# Altium PCB XLR8_pcb.PcbDoc
Units mm, origin at the board's own origin, x right, y up, seen from the top; angles counter-clockwise.
Board outline 137 x 105 mm, 2 copper layers (Top Layer, Bottom Layer); 70 components, 35 nets, 191 pads, 21 vias.
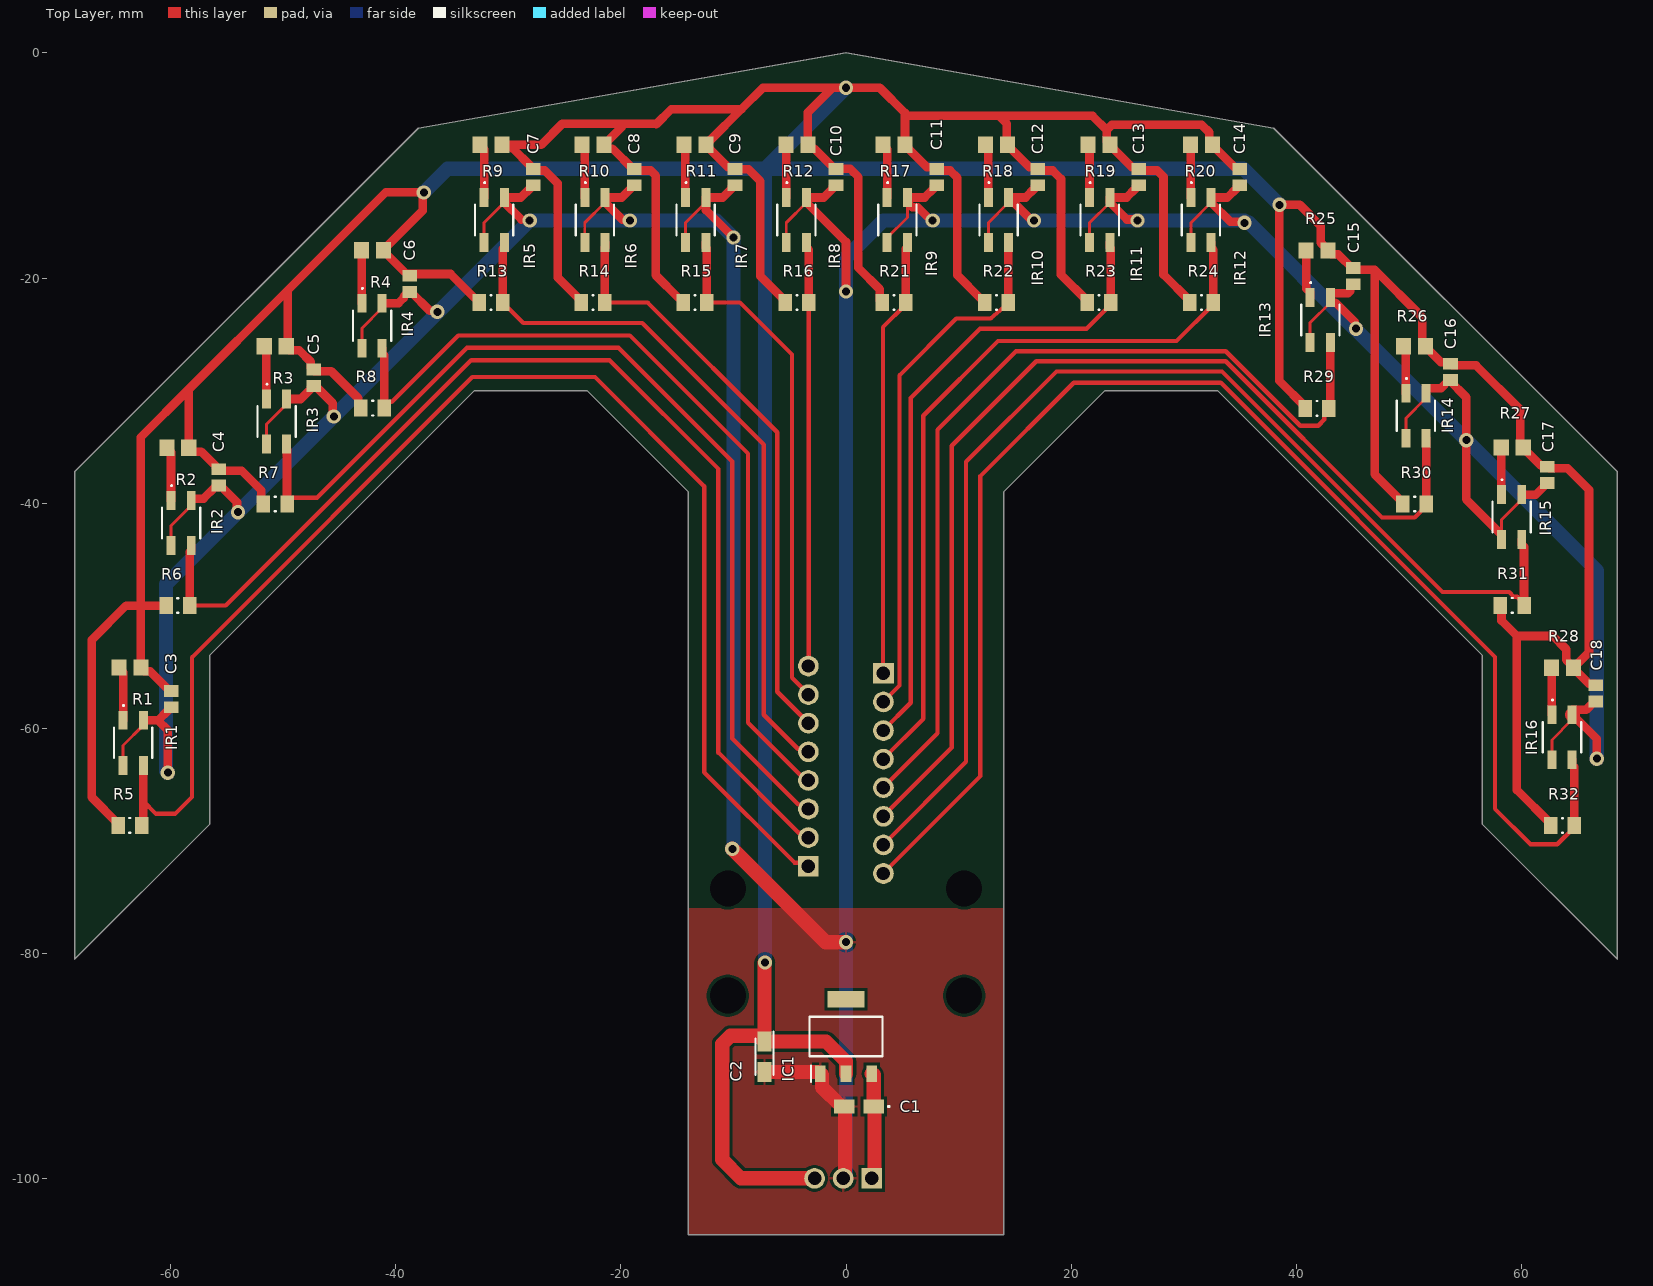
[diagram p0: Top Layer view]
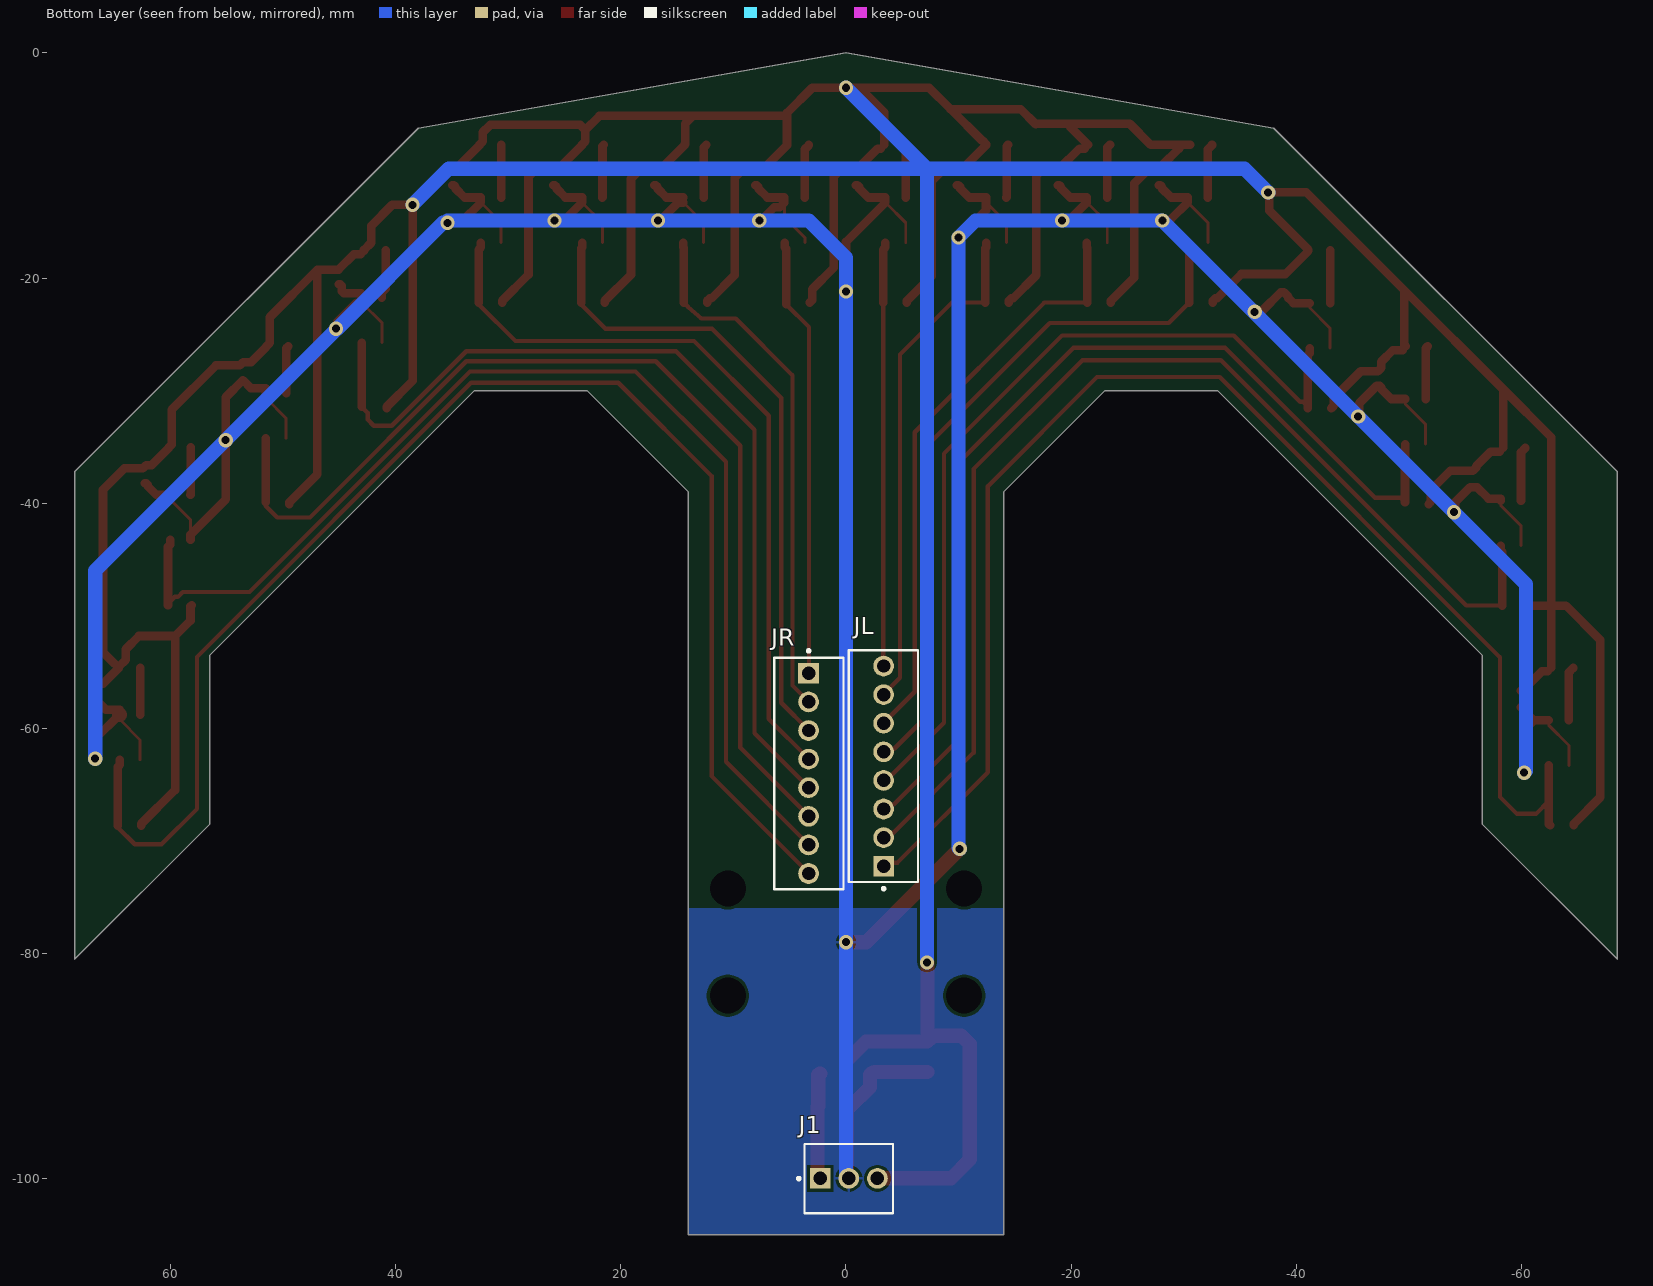
[diagram p1: Bottom Layer view, seen from below]
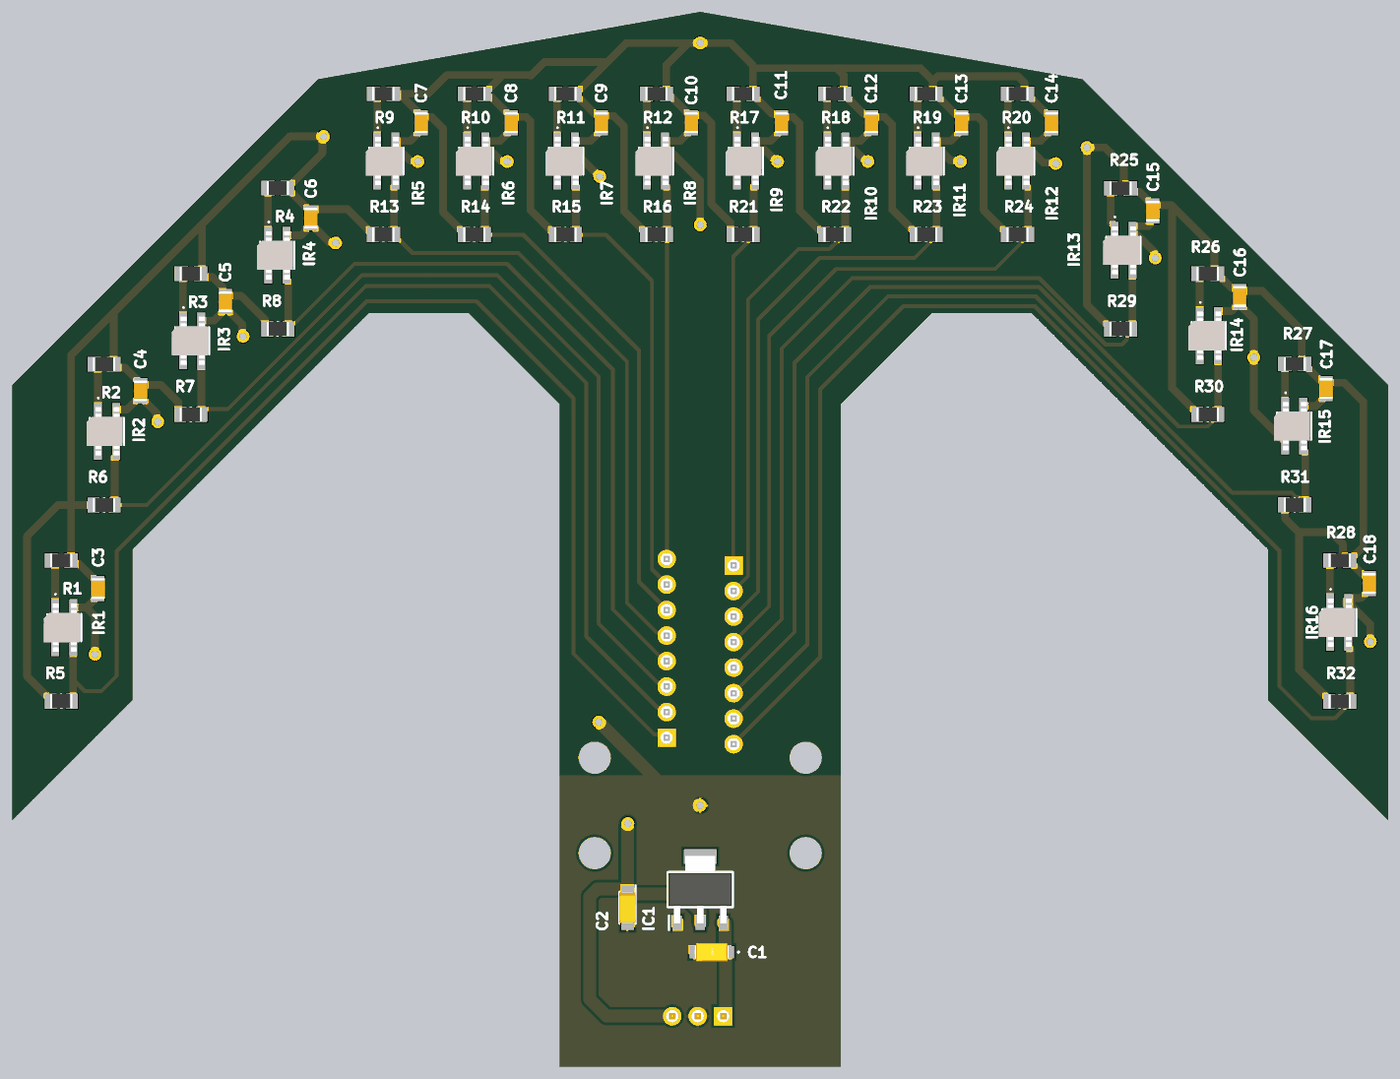
[diagram p2: 3D render of the assembled board from above, using the file's embedded part models]
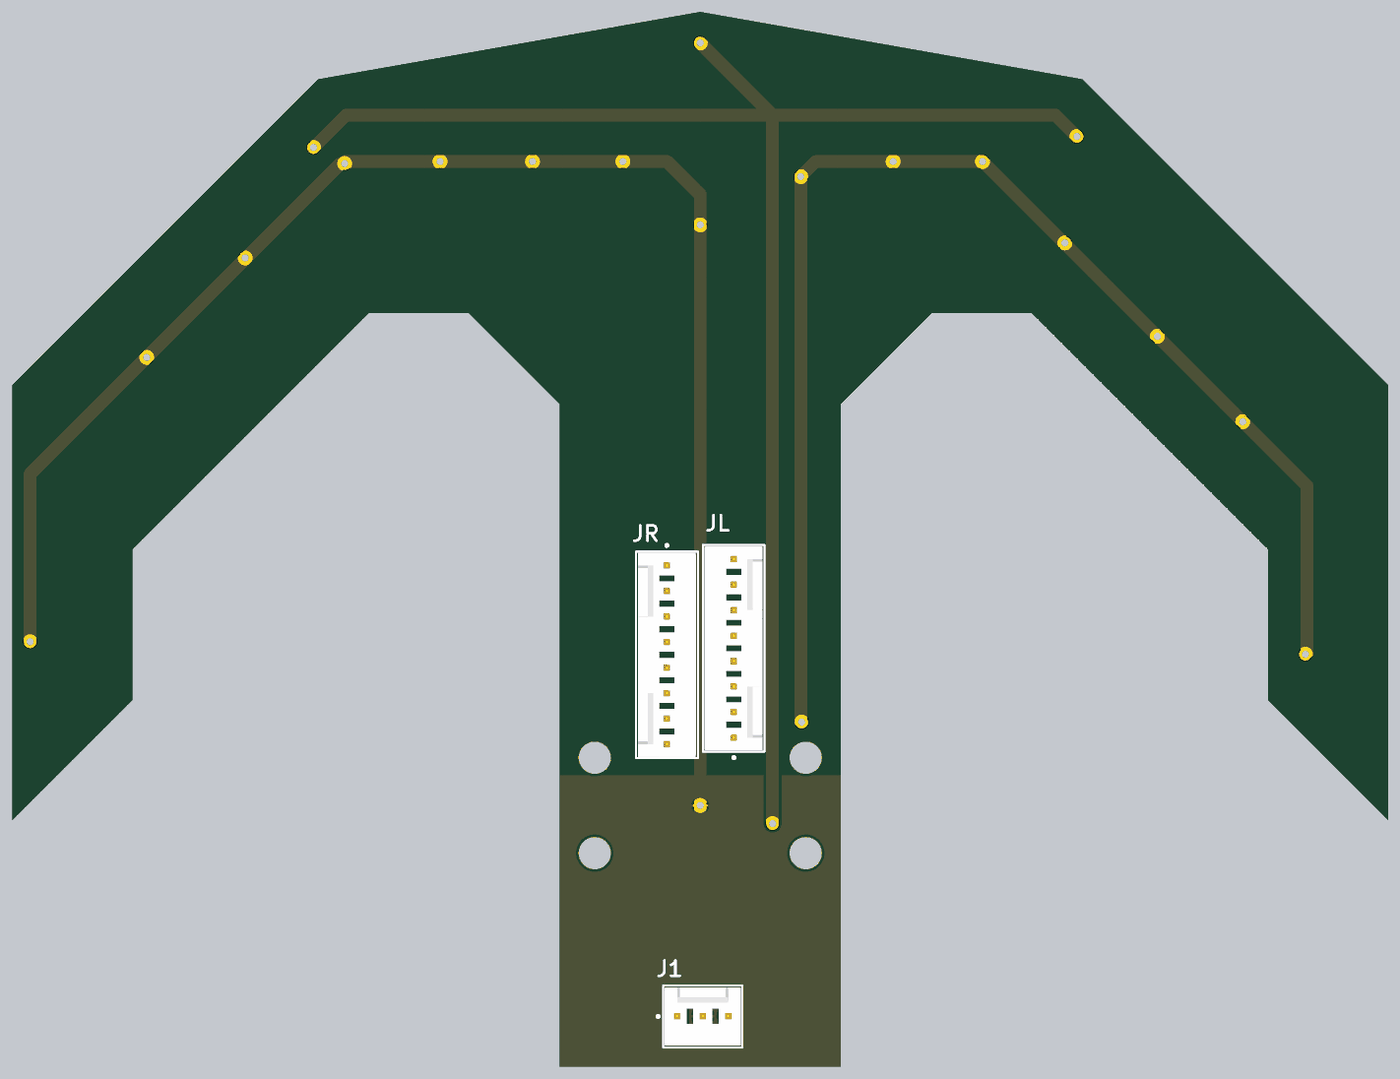
[diagram p3: 3D render of the assembled board from below, using the file's embedded part models]

## Layer stack, top to bottom
Top Solder: solder mask 0.0102, Solder Resist, Dk 3.5
Top Layer: signal copper 0.0356
Dielectric 1: dielectric 0.32, FR-4, Dk 4.8
Bottom Layer: signal copper 0.0356
Bottom Solder: solder mask 0.0102, Solder Resist, Dk 3.5

## Board outline
-68.5,-80.5 -56.5,-68.5 -56.5,-53.5 -33,-30 -23,-30 -14,-39 -14,-105 14,-105 14,-39 23,-30 33,-30 56.5,-53.5 56.5,-68.5 68.5,-80.5 68.5,-37.2 38,-6.7 0,0 -38,-6.7 -68.5,-37.2

## Design rules (kind name [scope] priority, off if disabled: settings)
Clearance [All] p1: gap=0.254 ignorepadtopadclearanceinfootprint=FALSE
PolygonConnect [All] p1: connectstyle=Relief reliefconductorwidth=0.254 reliefentries=4 polygonreliefangle="90 Angle" airgapwidth=0.254
RoutingVias [All] p1: holewidth=0.711 width=1.27 viastyle="Through Hole" minholewidth=0.711 minwidth=1.27 maxholewidth=0.711 maxwidth=1.27
SilkToSilkClearance [All] p1: silktosilkclearance=0.127
SolderMaskExpansion [All] p1: expansion=0.102 istentingtop=FALSE
Width [All] p1: maxlimit=1.27 minlimit=0.254 preferedwidth=0.762
29 further rules are at their usual default settings.

## Classes and differential pairs
component class Power: C1 C2 IC1
component class IR_array: C3 C4 C5 C6 C7 C8 C9 C10 C11 C12 C13 C14 C15 C16 C17 C18 IR1 IR2 IR3 IR4 IR5 IR6 IR7 IR8 IR9 IR10 IR11 IR12 IR13 IR14 IR15 IR16 R1 R2 R3 R4 R5 R6 R7 R8 R9 R10 R11 R12 R13 R14 R15 R16 R17 R18 R19 R20 R21 R22 R23 R24 R25 R26 R27 R28 R29 R30 R31 R32
component class Connectors: J1 JL JR

## Components (designator, comment, footprint, x,y, rotation, side; value= is the part's Value field where it differs from the comment)
C1 "T491A106K006AT7280" T491A 1.148,-93.599 r180 top
C2 "F931C226MAAAJ6" CAPPM3216X180N -7.239,-89.176 r270 top
C3 "Capacitor 100 nF +/-10% 50 V 0805" CAPC2013X95X50LL10T25 -59.944,-57.404 r270 top value=100nF
C4 "Capacitor 100 nF +/-10% 50 V 0805" CAPC2013X95X50LL10T25 -55.702,-37.719 r270 top value=100nF
C5 "Capacitor 100 nF +/-10% 50 V 0805" CAPC2013X95X50LL10T25 -47.269,-28.854 r270 top value=100nF
C6 "Capacitor 100 nF +/-10% 50 V 0805" CAPC2013X95X50LL10T25 -38.76,-20.523 r270 top value=100nF
C7 "Capacitor 100 nF +/-10% 50 V 0805" CAPC2013X95X50LL10T25 -27.788,-11.029 r270 top value=100nF
C8 "Capacitor 100 nF +/-10% 50 V 0805" CAPC2013X95X50LL10T25 -18.821,-11.029 r270 top value=100nF
C9 "Capacitor 100 nF +/-10% 50 V 0805" CAPC2013X95X50LL10T25 -9.855,-11.029 r270 top value=100nF
C10 "Capacitor 100 nF +/-10% 50 V 0805" CAPC2013X95X50LL10T25 -0.889,-11.029 r270 top value=100nF
C11 "Capacitor 100 nF +/-10% 50 V 0805" CAPC2013X95X50LL10T25 8.077,-11.029 r270 top value=100nF
C12 "Capacitor 100 nF +/-10% 50 V 0805" CAPC2013X95X50LL10T25 17.043,-11.029 r270 top value=100nF
C13 "Capacitor 100 nF +/-10% 50 V 0805" CAPC2013X95X50LL10T25 26.01,-11.029 r270 top value=100nF
C14 "Capacitor 100 nF +/-10% 50 V 0805" CAPC2013X95X50LL10T25 34.976,-11.029 r270 top value=100nF
C15 "Capacitor 100 nF +/-10% 50 V 0805" CAPC2013X95X50LL10T25 45.06,-19.837 r270 top value=100nF
C16 "Capacitor 100 nF +/-10% 50 V 0805" CAPC2013X95X50LL10T25 53.696,-28.346 r270 top value=100nF
C17 "Capacitor 100 nF +/-10% 50 V 0805" CAPC2013X95X50LL10T25 62.306,-37.49 r270 top value=100nF
C18 "Capacitor 100 nF +/-10% 50 V 0805" CAPC2013X95X50LL10T25 66.599,-56.896 r270 top value=100nF
IC1 "AMS1117-5.0" SOT229P700X180-4N 0,-87.376 r90 top
IR1 "QRE1113GR" QRE1113GR -63.32,-61.296 r270 top
IR2 "QRE1113GR" QRE1113GR -59.062,-41.766 r270 top
IR3 "QRE1113GR" QRE1113GR -50.582,-32.75 r270 top
IR4 "QRE1113GR" QRE1113GR -42.103,-24.233 r270 top
IR5 "QRE1113GR" QRE1113GR -31.25,-14.85 r270 top
IR6 "QRE1113GR" QRE1113GR -22.302,-14.85 r270 top
IR7 "QRE1113GR" QRE1113GR -13.353,-14.85 r270 top
IR8 "QRE1113GR" QRE1113GR -4.405,-14.85 r270 top
IR9 "QRE1113GR" QRE1113GR 4.557,-14.85 r270 top
IR10 "QRE1113GR" QRE1113GR 13.549,-14.85 r270 top
IR11 "QRE1113GR" QRE1113GR 22.54,-14.85 r270 top
IR12 "QRE1113GR" QRE1113GR 31.532,-14.85 r270 top
IR13 "QRE1113GR" QRE1113GR 42.128,-23.735 r270 top
IR14 "QRE1113GR" QRE1113GR 50.628,-32.235 r270 top
IR15 "QRE1113GR" QRE1113GR 59.128,-41.235 r270 top
IR16 "QRE1113GR" QRE1113GR 63.6,-60.793 r270 top
J1 "22-29-2031" FP-22-29-2031-MFG -0.25,-100 r180 bottom
JL "22-29-2081" FP-22-29-2081-MFG -3.322,-63.358 r270 bottom
JR "22-29-2081" FP-22-29-2081-MFG 3.302,-64.008 r90 bottom
R1 "Resistor 100k +/-1% 0805 125 mW" RESC2013X70X40ML20T20 -63.608,-54.604 r180 top value=100
R2 "Resistor 100k +/-1% 0805 125 mW" RESC2013X70X40ML20T20 -59.35,-35.074 r180 top value=100
R3 "Resistor 100k +/-1% 0805 125 mW" RESC2013X70X40ML20T20 -50.702,-26.059 r180 top value=100
R4 "Resistor 100k +/-1% 0805 125 mW" RESC2013X70X40ML20T20 -42.054,-17.541 r180 top value=100
R5 "Resistor 10k +/-1% 0805 125 mW" RESC2013X50X35ML15T15 -63.608,-68.625 r0 top value=10k
R6 "Resistor 10k +/-1% 0805 125 mW" RESC2013X50X35ML15T15 -59.35,-49.095 r0 top value=10k
R7 "Resistor 10k +/-1% 0805 125 mW" RESC2013X50X35ML15T15 -50.702,-40.08 r0 top value=10k
R8 "Resistor 10k +/-1% 0805 125 mW" RESC2013X50X35ML15T15 -42.054,-31.562 r0 top value=10k
R9 "Resistor 100k +/-1% 0805 125 mW" RESC2013X70X40ML20T20 -31.538,-8.158 r180 top value=100
R10 "Resistor 100k +/-1% 0805 125 mW" RESC2013X70X40ML20T20 -22.478,-8.158 r180 top value=100
R11 "Resistor 100k +/-1% 0805 125 mW" RESC2013X70X40ML20T20 -13.417,-8.158 r180 top value=100
R12 "Resistor 100k +/-1% 0805 125 mW" RESC2013X70X40ML20T20 -4.357,-8.158 r180 top value=100
R13 "Resistor 10k +/-1% 0805 125 mW" RESC2013X50X35ML15T15 -31.538,-22.179 r0 top value=10k
R14 "Resistor 10k +/-1% 0805 125 mW" RESC2013X50X35ML15T15 -22.478,-22.179 r0 top value=10k
R15 "Resistor 10k +/-1% 0805 125 mW" RESC2013X50X35ML15T15 -13.417,-22.179 r0 top value=10k
R16 "Resistor 10k +/-1% 0805 125 mW" RESC2013X50X35ML15T15 -4.357,-22.179 r0 top value=10k
R17 "Resistor 100k +/-1% 0805 125 mW" RESC2013X70X40ML20T20 4.269,-8.158 r180 top value=100
R18 "Resistor 100k +/-1% 0805 125 mW" RESC2013X70X40ML20T20 13.373,-8.158 r180 top value=100
R19 "Resistor 100k +/-1% 0805 125 mW" RESC2013X70X40ML20T20 22.477,-8.158 r180 top value=100
R20 "Resistor 100k +/-1% 0805 125 mW" RESC2013X70X40ML20T20 31.58,-8.158 r180 top value=100
R21 "Resistor 10k +/-1% 0805 125 mW" RESC2013X50X35ML15T15 4.269,-22.179 r0 top value=10k
R22 "Resistor 10k +/-1% 0805 125 mW" RESC2013X50X35ML15T15 13.373,-22.179 r0 top value=10k
R23 "Resistor 10k +/-1% 0805 125 mW" RESC2013X50X35ML15T15 22.477,-22.179 r0 top value=10k
R24 "Resistor 10k +/-1% 0805 125 mW" RESC2013X50X35ML15T15 31.58,-22.179 r0 top value=10k
R25 "Resistor 100k +/-1% 0805 125 mW" RESC2013X70X40ML20T20 41.84,-17.558 r180 top value=100
R26 "Resistor 100k +/-1% 0805 125 mW" RESC2013X70X40ML20T20 50.508,-26.058 r180 top value=100
R27 "Resistor 100k +/-1% 0805 125 mW" RESC2013X70X40ML20T20 59.177,-35.058 r180 top value=100
R28 "Resistor 100k +/-1% 0805 125 mW" RESC2013X70X40ML20T20 63.649,-54.616 r180 top value=100
R29 "Resistor 10k +/-1% 0805 125 mW" RESC2013X50X35ML15T15 41.84,-31.579 r0 top value=10k
R30 "Resistor 10k +/-1% 0805 125 mW" RESC2013X50X35ML15T15 50.508,-40.079 r0 top value=10k
R31 "Resistor 10k +/-1% 0805 125 mW" RESC2013X50X35ML15T15 59.177,-49.079 r0 top value=10k
R32 "Resistor 10k +/-1% 0805 125 mW" RESC2013X50X35ML15T15 63.649,-68.637 r0 top value=10k

## Footprints (in the part's own frame and the unit in brackets; to place one, negate y for a bottom-side part, rotate by r counter-clockwise, add the part's x,y. Pads: shape width x height; smd on the part's side, far side on the other; paste and mask are expansions set on the pad)
CAPC2013X95X50LL10T25 [mm] "Chip Capacitor, 2-Leads, Body 2.10x1.35mm, IPC High Density"
  rect 1.05x1.3 smd: 1(-0.725,0) 2(0.725,0)
  body extent -1.05,-0.67 1.05,0.67, height 0.95
CAPPM3216X180N [mm]
  rect 1.75x1.25 smd: 1(-1.35,0) 2(1.35,0)
  silkscreen extent -2.22,-0.8 1.6,0.8, body extent -1.6,-0.8 1.6,0.8, height 1.8
FP-22-29-2031-MFG [mm]
  rect 1.84x1.84 hole 1.19 paste-2539.97 mask+0: 1(-2.54,0.02)
  round 1.84 hole 1.19 paste-2539.97 mask+0: 2(0,0.02) 3(2.54,0.02)
  silkscreen extent -4.58,-3.08 3.94,3.08, body extent -3.81,-2.9 3.81,2.9, height 12.05
FP-22-29-2081-MFG [mm]
  rect 1.84x1.84 hole 1.19 paste-2539.97 mask+0: 1(8.89,0.02)
  round 1.84 hole 1.19 paste-2539.97 mask+0: 2(6.35,0.02) 3(3.81,0.02) 4(1.27,0.02) 5(-1.27,0.02) 6(-3.81,0.02) 7(-6.35,0.02) 8(-8.89,0.02)
  silkscreen extent -10.29,-3.08 11.01,3.08, body extent -10.16,-2.9 10.16,2.9, height 12.05
QRE1113GR [mm]
  rect 1.66x0.79 smd: 1(-2,-0.9) 2(2,-0.9) 3(2,0.9) 4(-2,0.9)
  silkscreen extent -3.35,-1.7 1.35,1.7, body extent -2.4,-2.04 2.4,1.56, height 1.87
RESC2013X50X35ML15T15 [mm] "Chip Resistor, 2-Leads, Body 2.2x1.4mm, IPC Low Density"
  rect 1.2x1.5 smd: 1(-1.05,0) 2(1.05,0)
  silkscreen extent -0.05,-0.65 0.05,0.65, body extent -1.1,-0.7 1.1,0.7, height 0.5
RESC2013X70X40ML20T20 [mm] "Chip Resistor, 2-Leads, Body 2.2x1.35mm, IPC Low Density"
  rect 1.35x1.45 smd: 1(-0.975,0) 2(0.975,0)
  body extent -1.1,-0.67 1.1,0.67, height 0.7
SOT229P700X180-4N [mm]
  rect 1.45x0.95 smd: 1(-3.3,2.29) 2(-3.3,0) 3(-3.3,-2.29)
  rect 1.45x3.25 smd: 4(3.3,0)
  silkscreen extent -4.03,-3.25 1.75,3.25, body extent -3.35,-3.15 3.35,3.15, height 1.8
T491A [mm]
  rect 1.8x1.23 smd: 1(-1.31,0) 2(1.31,0)
  silkscreen extent -2.71,-0.05 -2.61,0.05, body extent -1.7,-0.9 1.7,0.9, height 1.81

## Part data
C1: "Capacitor Polarised", Capacitance=10uf, Manufacturer_Name=KEMET, Mouser Part Number=80-T491A106K0067280, Arrow Part Number=T491A106K006AT7280, Arrow Price/Stock=https://www.arrow.com/en/products/t491a106k006at7280/kemet-corporation?region=nac, Datasheet Link=https://content.kemet.com/datasheets/KEM_T2005_T491.pdf, Height=1.8mm, Manufacturer_Part_Number=T491A106K006AT7280, Mouser Price/Stock=https://www.mouser.co.uk/ProductDetail/KEMET/T491A106K006AT7280?qs=EtU2D%2FqTXbN9MxxgrIrCXA%3D%3D
C2: "Capacitor Polarised", Capacitance=22uf, Manufacturer_Name="Kyocera AVX", Mouser Part Number=581-F931C226MAAAJ6, Arrow Part Number=F931C226MAAAJ6, Arrow Price/Stock=https://www.arrow.com/en/products/f931c226maaaj6/avx, Datasheet Link=https://datasheet.datasheetarchive.com/originals/distributors/Datasheets_SAMA/dc9a3b3d744ab3693b5a12837d30b034.pdf, Height=1.8mm, Manufacturer_Part_Number=F931C226MAAAJ6, Mouser Price/Stock=https://www.mouser.co.uk/ProductDetail/AVX/F931C226MAAAJ6?qs=5aG0NVq1C4wg0PYYXTBb0Q%3D%3D
C3 C4 C5 C6 C7 C8 C9 C10 C11 C12 C13 C14 C15 C16 C17 C18: library part CMP-001-00018-6, "Chip Capacitor, 100 nF, +/- 10%, 50 V, 0805 (2012 Metric)", Capacitor Type=Ceramic, Case/Package=0805, Max Operating Temperature=125°C, Min Operating Temperature=-55°C, Tolerance=10%, Voltage Rating=50V, Mounting Technology=SM, Pins=2, RoHS Compliant=True
IC1: "Integrated Circuit", Manufacturer_Name="Advanced Monolithic Systems", Datasheet Link=http://www.advanced-monolithic.com/pdf/ds1117.pdf, Height=1.8mm, Manufacturer_Part_Number=AMS1117-5.0
IR1 IR2 IR3 IR4 IR5 IR6 IR7 IR8 IR9 IR10 IR11 IR12 IR13 IR14 IR15 IR16: "Undefined or Miscellaneous", Manufacturer_Name=onsemi, Mouser Part Number=512-QRE1113GR, Arrow Part Number=QRE1113GR, Arrow Price/Stock=https://www.arrow.com/en/products/qre1113gr/on-semiconductor?utm_currency=USD&region=europe, Datasheet Link=http://www.onsemi.com/pub/Collateral/QRE1113-D.PDF, Manufacturer_Part_Number=QRE1113GR, Mouser Price/Stock=https://www.mouser.co.uk/ProductDetail/onsemi-Fairchild/QRE1113GR?qs=Qb0BA3xILekkPpSVC5x7uQ%3D%3D
J1: library part CMP-04776-000327-1, "CONN HEADER VERT 3POS 2.54MM", COLOR=Natural, Contact Resistance=10mR, Current Rating=4A, Housing Color=White, Max Operating Temperature=75°C, Min Operating Temperature=0°C, Voltage Rating=250V, Connector Type="Male Pin", Contact Material=Brass, Contact Mating Length=0.295inch, Contact Plating=Gold, Contact Type="Male Pin", Depth=5.8mm, Fastening Type=Friction, Gender=Male, Housing Material=Nylon, Lead Pitch=2.54mm, Length=7.62mm, Mount="Through Hole", Number of Contacts=3, Number of Positions=3, Number of Rows=1, Orientation=Straight, Packaging=Bulk, Pitch=2.54mm, Radiation Hardening=No, RoHS Compliant=Yes, Series="KK® 6410", Termination=Solder, Working Voltage=250V
JL JR: library part CMP-00257-00277737-1, "22-29-2081 KK® 254 Wire-to-Board Header, Vertical, with Friction Lock, 8 Circuits, Gold (Au) Plating", COLOR=White, Contact Resistance=10mΩ, Current Rating=4A, Flammability Rating="UL94 V-0", Insulation Resistance=50GΩ, Max Operating Temperature=75°C, Min Operating Temperature=-40°C, Voltage Rating=250V, Contact Material=Brass, Contact Plating=Gold, Gender=Male, Glow Wire Compliant=Non-compliant, Halogen Free="Low Halogen", Height=11.42mm, Housing Material=Nylon, Lead Free="Lead Free", Lead Pitch=2.54mm, Mount="Through Hole", NexarPartId=277737, Number of Circuits=8, Number of Contacts=8, Number of Pins=8, Number of Positions=8, Number of Rows=1, Orientation=Vertical, Packaging=Bulk, Pitch=2.54mm, Radiation Hardening=No, REACH SVHC=Unknown, RoHS=Compliant, Schedule B=8536694040, Termination="Through Hole", Voltage Rating (DC)=250V
R1 R2 R3 R4 R9 R10 R11 R12 R17 R18 R19 R20 R25 R26 R27 R28: library part CMP-009-00024-5, "Chip Resistor, 100 KOhm, +/- 1%, 0.125 W, -55 to 155 degC, 0805 (2012 Metric)", Case/Package=0805, Max Operating Temperature=155°C, Min Operating Temperature=-55°C, Power=125mW, Tolerance=1%, Voltage Rating=150V, Mounting Technology=SM, Pins=2, RoHS Compliant=True
R5 R6 R7 R8 R13 R14 R15 R16 R21 R22 R23 R24 R29 R30 R31 R32: library part CMP-009-00018-5, "Chip Resistor, 10 KOhm, +/- 1%, 125 mW, -55 to 155 degC, 0805 (2012 Metric)", Case/Package=0805, Max Operating Temperature=155°C, Min Operating Temperature=-55°C, Power=125mW, Tolerance=1%, Voltage Rating=150V, Mounting Technology=SM, Pins=2, RoHS Compliant=True

## Free pads (board coordinates)
  round 1.524 hole 3.2: MH(-10.5,-83.75) MH(-10.5,-74.25) MH(10.5,-83.75) MH(10.5,-74.25)

## Via types
v1: diameter 1.27, hole 0.711, Top Layer to Bottom Layer, 21 vias

## Nets (pads, with @x,y where several pads share a name; then routed paths per layer and width w, separated by ;. In a path a pad name is that pad's centre, name@x,y a point inside that pad or via, vN(x,y) a via of type N, cw(c..) or ccw(c..) an arc to the next point about the centre after c; other vN are vias at no path point)
+5-IR: C2.1 C3.1 C4.1 C5.1 C6.1 C7.1 C8.1 C9.1 C10.1 C11.1 C12.1 C13.1 C14.1 C15.1 C16.1 C17.1 C18.1 IC1.2 J1.3 R1.1 R2.1 R3.1 R4.1 R5.1 R6.1 R7.1 R8.1 R9.1 R10.1 R11.1 R12.1 R13.1 R14.1 R15.1 R16.1 R17.1 R18.1 R19.1 R20.1 R21.1 R22.1 R23.1 R24.1 R25.1 R26.1 R27.1 R28.1 R29.1 R30.1 R31.1 R32.1 | length 671.5
  Top Layer w0.762: R5.1 -64.658,-68.475 -67,-66.133 -67,-52.146 -63.949,-49.095 -62.633,-49.095 ; R1.1 -62.633,-49.095 ; R1.1@-62.339,-54.948 -61.8,-54.948 -60.069,-56.679 C3.1 ; R6.1 -62.633,-49.095 ; R2.1 -58.375,-29.875 ; R2.1@-58.081,-35.418 -57.278,-35.418 -55.971,-36.725 -55.971,-36.85 -55.683,-37.138 -53.662,-37.138 -51.958,-38.842 -51.958,-39.874 R7.1 ; R3.1 -49.6,-25.931 -49.6,-21.1 ; R3.1@-49.433,-26.402 -48.578,-26.402 -47.538,-27.442 -47.538,-27.985 -47.25,-28.273 -45.727,-28.273 -43.323,-30.677 -43.323,-31.343 R8.1 ; R13.1 -32.588,-22.029 -32.807,-21.81 -32.957,-21.81 -35.127,-19.641 -39.029,-19.641 -41.079,-17.591 R4.1 -41.079,-17.491 -37.597,-14.009 -37.597,-12.497 v1(-37.5,-12.4) -40.9,-12.4 -49.6,-21.1 ; R9.1 -27.058,-8.158 -25.2,-6.3 -16.9,-6.3 -16.85,-6.35 -15.5,-5 -9.284,-5 ; -29.589,-8.502 -28.057,-10.035 -28.057,-10.16 -27.913,-10.304 C7.1 -27.644,-10.448 -26.752,-10.448 -25.6,-11.6 -25.6,-19.957 -23.528,-22.029 R14.1 ; R10.1 -19.944,-6.6 ; R10.1@-21.209,-8.502 -20.748,-8.502 -18.946,-10.304 C8.1 -18.677,-10.448 -17.352,-10.448 -16.9,-10.9 -16.9,-19.746 -14.836,-21.81 -14.686,-21.81 -14.467,-22.029 R15.1 ; C9.1@-9.801,-10.358 -8.642,-10.358 -7.6,-11.4 -7.6,-19.836 -5.407,-22.029 R16.1 ; C9.1@-9.711,-10.448 -9.999,-10.16 -10.491,-10.16 -12.442,-8.208 R11.1 -12.442,-8.108 -12.148,-7.814 -12.098,-7.814 -9.284,-5 ; R12.1 -3.382,-5.282 -1.2,-3.1 ; R12.1@-3.088,-8.502 -2.815,-8.502 -1.014,-10.304 C10.1 -0.882,-10.311 0.371,-10.311 0.654,-10.594 1.1,-11.04 1.1,-19.1 3,-21 3,-21.96 R21.1 ; 5.244,-5.6 13.6,-5.6 ; R22.1 12.323,-22.029 12.104,-21.81 11.954,-21.81 9.9,-19.756 9.9,-11.1 9.248,-10.448 8.221,-10.448 7.933,-10.16 7.195,-10.16 5.244,-8.208 R17.1 5.244,-5.344 3,-3.1 v1(0,-3.1) -1.2,-3.1 ; R23.1 21.427,-22.029 19.1,-19.703 19.1,-11.2 18.348,-10.448 17.187,-10.448 16.899,-10.16 16.299,-10.16 14.348,-8.208 R18.1 14.29,-8.101 14.29,-6.29 13.6,-5.6 ; R24.1 30.53,-22.029 28.2,-19.699 28.2,-11 27.648,-10.448 26.154,-10.448 25.866,-10.16 25.403,-10.16 23.452,-8.208 R19.1 23.158,-7.864 23.158,-6.858 ; C14.1 34.832,-10.16 34.507,-10.16 32.555,-8.208 R20.1 32.261,-7.864 32.261,-7.061 31.6,-6.4 23.615,-6.4 23.158,-6.858 ; R29.1 40.79,-31.429 38.5,-29.139 v1(38.5,-13.5) 40.3,-13.5 42.175,-15.375 42.175,-16.868 42.815,-17.508 R25.1 ; R25.1@43.109,-17.902 43.725,-17.902 45.079,-19.256 46.956,-19.256 ; R30.1 49.458,-39.929 46.956,-37.427 46.956,-19.256 ; R31.1 58.224,-49.177 58.224,-50.424 59.6,-51.8 ; R32.1 62.599,-68.487 59.6,-65.489 59.6,-51.8 ; R28.1@64.968,-54.272 66,-53.24 66,-38.8 64.109,-36.909 62.45,-36.909 C17.1 62.162,-36.621 61.665,-36.621 60.152,-35.108 R27.1 59.888,-34.794 59.888,-31.688 55.965,-27.765 53.84,-27.765 C16.1 53.552,-27.477 52.852,-27.477 51.483,-26.108 R26.1 51.189,-25.764 51.189,-23.489 46.956,-19.256 ; C18.1 66.455,-56.027 65.984,-56.027 64.624,-54.666 64.624,-54.566 63.984,-53.926 63.984,-52.984 62.8,-51.8 59.6,-51.8 ; -62.633,-49.095 -62.633,-34.133 -58.375,-29.875 ; -58.375,-29.875 -49.6,-21.1 ; -9.284,-5 -7.384,-3.1 -1.2,-3.1 ; 13.6,-5.6 21.9,-5.6 23.158,-6.858
  Top Layer w1.27: v1(-7.2,-80.8) -7.239,-80.839 C2.1@-7.239,-87.596 ; J1.3@-2.54,-99.98 -9.32,-99.98 -11,-98.3 -11,-88.044 -10.256,-87.3 -7.765,-87.3 -7.479,-87.586 -7.249,-87.586 C2.1@-7.239,-87.596 ; IC1.2 0,-89.6 -1.774,-87.826 C2.1 C2.1@-7.239,-87.596
  Bottom Layer w1.27: v1(-37.5,-12.4) -35.4,-10.3 -7.2,-10.3 ; v1(-7.2,-80.8) -7.2,-10.3 ; v1(0,-3.1) -7.2,-10.3 ; v1(38.5,-13.5) 35.3,-10.3 -7.2,-10.3
+7.4V: C1.1 IC1.3 J1.1 | length 9.5
  Top Layer w1.27: IC1.3 2.36,-90.676 2.458,-90.774 C1.1 2.52,-93.599 2.54,-93.619 J1.1@2.54,-99.98
GND: C1.2 C2.2 C3.2 C4.2 C5.2 C6.2 C7.2 C8.2 C9.2 C10.2 C11.2 C12.2 C13.2 C14.2 C15.2 C16.2 C17.2 C18.2 IC1.1 IR1.2 IR1.4 IR2.2 IR2.4 IR3.2 IR3.4 IR4.2 IR4.4 IR5.2 IR5.4 IR6.2 IR6.4 IR7.2 IR7.4 IR8.2 IR8.4 IR9.2 IR9.4 IR10.2 IR10.4 IR11.2 IR11.4 IR12.2 IR12.4 IR13.2 IR13.4 IR14.2 IR14.4 IR15.2 IR15.4 IR16.2 IR16.4 J1.2 | length 536.6
  Top Layer w0.254: IR1.2 -64.22,-61.531 -62.42,-59.731 IR1.4 ; IR2.2 -59.962,-42.001 -58.162,-40.201 IR2.4 ; IR3.2 -51.482,-32.985 -49.682,-31.185 IR3.4 ; IR4.2 -43.003,-24.468 -41.203,-22.668 IR4.4 ; IR5.2 -32.15,-15.085 IR5.4@-30.35,-13.285 ; IR6.2 -23.202,-15.085 IR6.4@-21.402,-13.285 ; IR7.2 -14.253,-15.085 IR7.4@-12.453,-13.285 ; IR8.2 -5.305,-15.085 IR8.4@-3.505,-13.285 ; IR9.2 3.657,-16.415 5.457,-14.615 IR9.4 ; IR10.2 12.649,-15.085 14.449,-13.285 IR10.4 ; IR11.2 21.64,-15.085 IR11.4@23.44,-13.285 ; IR12.2 30.632,-15.085 IR12.4@32.432,-13.285 ; IR13.2 41.228,-23.97 IR13.4@43.028,-22.17 ; IR14.2 49.728,-32.47 51.528,-30.67 IR14.4 ; IR15.2@58.228,-42.8 58.228,-41.47 60.028,-39.67 IR15.4 ; IR16.2 62.7,-61.028 64.5,-59.228 IR16.4
  Top Layer w0.762: IR1.4 -61.111,-59.296 ; v1(-60.244,-63.944) -60.244,-60.162 -61.111,-59.296 ; C3.2 -60.069,-58.129 -60.213,-58.273 -60.213,-58.398 -61.111,-59.296 ; IR2.4 -58.162,-39.609 -58.148,-39.595 -57.07,-39.595 -56.064,-38.588 -55.433,-38.588 -54.097,-39.924 -54.097,-40.703 v1(-54,-40.8) ; IR3.4 -48.44,-30.75 -47.538,-29.848 -47.538,-29.723 -47.394,-29.579 C5.2 -47.144,-29.579 -45.597,-31.127 -45.597,-32.203 v1(-45.5,-32.3) ; IR4.4 -39.745,-22.233 -39.298,-21.786 -39.298,-21.661 -38.885,-21.248 C6.2 -38.635,-21.248 -36.981,-22.903 -36.397,-22.903 v1(-36.3,-23) ; -28.832,-14.803 -30.35,-13.285 IR5.4 -28.884,-12.85 -28.057,-12.023 -28.057,-11.898 -27.913,-11.754 C7.2 ; IR6.4 -19.918,-12.85 -19.09,-12.023 -19.09,-11.898 -18.946,-11.754 C8.2 ; IR6.4@-21.388,-12.85 -21.388,-13.299 -19.884,-14.803 ; v1(-10,-16.4) -12.439,-13.961 -12.439,-13.299 -12.453,-13.285 IR7.4 -10.952,-12.85 -10.124,-12.023 -10.124,-11.898 -9.98,-11.754 C9.2 ; C10.2 -1.014,-11.754 -1.158,-11.898 -1.158,-12.023 -1.985,-12.85 IR8.4 -3.505,-13.285 0,-16.79 v1(0,-21.2) ; IR9.4@5.471,-12.85 5.471,-13.299 5.898,-13.725 6.388,-13.725 7.563,-14.9 v1(7.7,-14.9) ; IR9.4@5.502,-12.85 6.981,-12.85 7.808,-12.023 7.808,-11.898 7.952,-11.754 C11.2 ; IR10.4@14.449,-13.285 14.463,-13.299 14.898,-13.299 16.402,-14.803 16.603,-14.803 v1(16.7,-14.9) ; IR10.4 15.947,-12.85 16.774,-12.023 16.774,-11.898 16.918,-11.754 C12.2 ; v1(25.9,-14.9) 25.803,-14.803 24.958,-14.803 23.44,-13.285 IR11.4 24.913,-12.85 25.741,-12.023 25.741,-11.898 25.885,-11.754 C13.2 ; C14.2 34.851,-11.754 34.707,-11.898 34.707,-12.023 33.879,-12.85 IR12.4 32.432,-13.285 34.15,-15.003 35.303,-15.003 v1(35.4,-15.1) ; IR13.4@43.042,-21.966 43.042,-22.184 43.477,-22.184 v1@45.203,-23.909 ; IR13.4@43.042,-21.735 43.042,-21.336 44.613,-21.336 44.791,-21.159 44.791,-20.706 44.935,-20.562 C15.2 ; IR14.4 51.528,-29.8 51.542,-29.786 52.856,-29.786 53.571,-29.071 55.1,-30.601 v1(55.1,-34.4) 55.1,-39.671 58.228,-42.8 IR15.2 ; IR15.4 61.287,-39.235 62.037,-38.484 62.037,-38.359 62.181,-38.215 C17.2 ; IR16.4 64.5,-58.358 64.514,-58.344 65.751,-58.344 66.474,-57.621 C18.2 ; IR16.4@64.545,-58.793 66.7,-60.947 v1(66.7,-62.7)
  Top Layer w1.27: v1(-10.1,-70.7) -1.8,-79 v1(0,-79) ; C2.2 -2.51,-90.526 -2.36,-90.676 IC1.1 -2.22,-90.676 -2.13,-90.766 -2.13,-91.876 -0.407,-93.599 C1.2 -0.101,-93.599 -0.081,-93.619 -0.081,-99.899 0,-99.98 J1.2@0,-99.998 ; IR16.4 IR16.4@64.545,-58.793
  Bottom Layer w1.27: v1(-60.244,-63.944) -60.4,-63.789 -60.4,-47.2 v1(-28.1,-14.9) v1(-19.2,-14.9) -11.5,-14.9 v1(-10,-16.4) -10,-70.6 v1(-10.1,-70.7) ; J1.2@0,-99.98 v1(0,-79) v1(0,-21.2) 0,-18.2 3.3,-14.9 v1(7.7,-14.9) v1(16.7,-14.9) v1(25.9,-14.9) v1@35.4,-14.9 ; v1@35.8,-15.1 45.2,-24.5 v1(45.3,-24.5) 45.3,-24.6 v1(55.1,-34.4) 66.7,-46 v1(66.7,-62.7)
NetIR1_1: IR1.1 R1.2 | length 4.8
  Top Layer w0.762: R1.2 -64.583,-54.654 -64.22,-55.017 IR1.1
NetIR1_3: IR1.3 JL.1 R5.2 | length 122
  Top Layer w0.381: IR1.3@-62.558,-63.727 -62.558,-63.434 IR1.3 ; -62.42,-66.48 -61.3,-67.6 -59.6,-67.6 -58.1,-66.1 -58.1,-53.7 -33.2,-28.8 -22.3,-28.8 -12.6,-38.5 -12.6,-63.9 -4.57,-71.93 -3.62,-71.93 JL.1@-3.302,-72.248 ; IR1.3@-62.42,-63.717 IR1.3@-62.42,-63.434
  Top Layer w0.762: R5.2 -62.434,-68.5 -62.434,-66.48 -62.434,-63.717 -62.434,-63.31 IR1.3
NetIR2_1: IR2.1 R2.2 | length 4.8
  Top Layer w0.762: R2.2 -60.325,-35.124 -59.962,-35.488 IR2.1
NetIR2_3: IR2.3 JL.2 R6.2 | length 101.7
  Top Layer w0.381: R6.2 -55.095,-49.095 -33.3,-27.3 -21,-27.3 -11.337,-36.963 -11.337,-62.163 -4.221,-69.279 -4.125,-69.279 -3.697,-69.708 JL.2@-3.302,-69.708
  Top Layer w0.762: R6.2 -58.3,-44.339 -58.162,-44.201 IR2.3
NetIR3_1: IR3.1 R3.2 | length 4.8
  Top Layer w0.762: R3.2 -51.496,-26.24 -51.496,-30.736 IR3.1
NetIR3_3: IR3.3 JL.3 R7.2 | length 88.8
  Top Layer w0.381: R7.2 -49.652,-39.93 -49.243,-39.52 -46.984,-39.52 -33.664,-26.2 -20.2,-26.2 -10.1,-36.3 -10.1,-60.9 -4.241,-66.759 -4.105,-66.759 -3.697,-67.168 JL.3@-3.302,-67.168
  Top Layer w0.762: IR3.3 -49.682,-35.185 -49.652,-35.215 R7.2@-49.652,-39.93
NetIR4_1: IR4.1 R4.2 | length 4.7
  Top Layer w0.762: R4.2 -43.029,-21.771 -43.003,-21.798 IR4.1
NetIR4_3: IR4.3 JL.4 R8.2 | length 76.3
  Top Layer w0.381: R8.2 -41.004,-31.412 -40.595,-31.002 -40.35,-31.002 -34.448,-25.1 -19.2,-25.1 -8.7,-35.6 -8.7,-59.5 -3.572,-64.628 JL.4@-3.302,-64.628
  Top Layer w0.762: IR4.3 -41.203,-26.668 -41.004,-26.866 R8.2
NetIR5_1: IR5.1 R9.2 | length 4.8
  Top Layer w0.762: R9.2 -32.513,-8.208 -32.15,-8.572 IR5.1
NetIR5_3: IR5.3 JL.5 R13.2 | length 63.2
  Top Layer w0.381: R13.2 -28.668,-24 -18.1,-24 -7.3,-34.8 -7.3,-58.8 -4.291,-61.809 -3.581,-61.809 JL.5@-3.302,-62.088
  Top Layer w0.762: R13.2 -30.488,-17.423 -30.35,-17.285 IR5.3
NetIR6_1: IR6.1 R10.2 | length 4.8
  Top Layer w0.762: R10.2 -23.216,-8.396 -23.216,-12.836 IR6.1
NetIR6_3: IR6.3 JL.6 R14.2 | length 52.4
  Top Layer w0.381: R14.2 -17.621,-22.179 -6.1,-33.7 -6.1,-56.75 JL.6@-3.302,-59.548
  Top Layer w0.762: R14.2 -21.428,-17.311 -21.402,-17.285 IR6.3
NetIR7_1: IR7.1 R11.2 | length 4.7
  Top Layer w0.762: R11.2 -14.267,-8.283 -14.267,-12.836 IR7.1
NetIR7_3: IR7.3 JL.7 R15.2 | length 45.7
  Top Layer w0.381: R15.2 -9.421,-22.179 -4.8,-26.8 -4.8,-55.51 JL.7@-3.302,-57.008
  Top Layer w0.762: IR7.3 -12.453,-17.285 -12.367,-17.371 R15.2
NetIR8_1: IR8.1 R12.2 | length 4.7
  Top Layer w0.762: R12.2 -5.318,-8.172 -5.318,-12.837 IR8.1
NetIR8_3: IR8.3 JL.8 R16.2 | length 37.7
  Top Layer w0.381: R16.2 -3.302,-22.184 JL.8@-3.302,-54.468
  Top Layer w0.762: IR8.3 -3.505,-17.285 -3.307,-17.483 R16.2
NetIR9_1: IR9.1 R17.2 | length 4.8
  Top Layer w0.762: R17.2 3.294,-8.208 3.657,-8.572 IR9.1
NetIR9_3: IR9.3 JR.1 R21.2 | length 39.2
  Top Layer w0.381: JR.1@3.282,-55.118 3.282,-24.366 R21.2@5.319,-22.329
  Top Layer w0.762: R21.2@5.319,-22.329 R21.2 5.319,-17.423 5.457,-17.285 IR9.3
NetIR10_1: IR10.1 R18.2 | length 4.8
  Top Layer w0.762: R18.2 12.635,-8.396 12.635,-12.836 IR10.1
NetIR10_3: IR10.3 JR.2 R22.2 | length 47.3
  Top Layer w0.381: JR.2@3.282,-57.658 4.75,-56.19 4.75,-28.65 9.8,-23.6 12.846,-23.6 14.013,-22.589 R22.2
  Top Layer w0.762: R22.2 14.423,-17.311 14.449,-17.285 IR10.3
NetIR11_1: IR11.1 R19.2 | length 4.7
  Top Layer w0.762: R19.2 21.626,-8.283 21.626,-12.836 IR11.1
NetIR11_3: IR11.3 JR.3 R23.2 | length 57.3
  Top Layer w0.381: JR.3@3.282,-60.198 5.75,-57.73 5.75,-30.65 11.9,-24.5 21.356,-24.5 23.527,-22.329 R23.2
  Top Layer w0.762: IR11.3 23.44,-17.285 23.527,-17.371 R23.2
NetIR12_1: IR12.1 R20.2 | length 4.7
  Top Layer w0.762: R20.2 30.619,-8.172 30.619,-12.837 IR12.1
NetIR12_3: IR12.3 JR.4 R24.2 | length 67.4
  Top Layer w0.381: JR.4@3.282,-62.738 6.858,-59.162 6.858,-32.242 13.5,-25.6 29.36,-25.6 32.63,-22.329 R24.2
  Top Layer w0.762: IR12.3 32.432,-17.285 32.63,-17.483 R24.2
NetIR13_1: IR13.1 R25.2 | length 4.3
  Top Layer w0.762: R25.2 40.865,-20.936 41.228,-21.3 IR13.1
NetIR13_3: IR13.3 JR.5 R29.2 | length 80.9
  Top Layer w0.381: JR.5@3.282,-65.278 8.128,-60.432 8.128,-33.472 15.1,-26.5 33.732,-26.5 40.348,-33.116 41.949,-33.116 42.49,-32.576 42.49,-31.979 R29.2
  Top Layer w0.762: R29.2@43.014,-31.455 43.014,-25.749 IR13.3
NetIR14_1: IR14.1 R26.2 | length 4.3
  Top Layer w0.762: R26.2 49.714,-26.239 49.714,-30.221 IR14.1
NetIR14_3: IR14.3 JR.6 R30.2 | length 92.9
  Top Layer w0.381: JR.6@3.282,-67.818 9.398,-61.702 9.398,-34.902 16.9,-27.4 33.734,-27.4 47.608,-41.274 50.514,-41.274 51.558,-40.229 R30.2 R30.2@51.558,-39.929
  Top Layer w0.762: IR14.3 51.528,-34.67 51.558,-34.7 R30.2@51.558,-39.929
NetIR15_1: IR15.1 R27.2 | length 4.2
  Top Layer w0.762: R27.2 58.215,-35.072 58.215,-39.221 IR15.1
NetIR15_3: IR15.3 JR.7 R31.2 | length 104.6
  Top Layer w0.381: JR.7@3.282,-70.358 10.668,-62.972 10.668,-36.322 18.69,-28.3 33.4,-28.3 52.985,-47.885 58.911,-47.885 59.351,-48.325 59.623,-48.325 60.227,-48.929 R31.2
  Top Layer w0.762: IR15.3 60.028,-43.67 60.227,-43.868 R31.2
NetIR16_1: IR16.1 R28.2 | length 4.2
  Top Layer w0.762: R28.2 62.674,-58.331 62.7,-58.358 IR16.1
NetIR16_3: IR16.3 JR.8 R32.2 | length 126.7
  Top Layer w0.381: JR.8@3.282,-72.898 11.938,-64.242 11.938,-37.592 20.23,-29.3 33.3,-29.3 57.658,-53.658 57.658,-67.158 60.8,-70.3 63.186,-70.3 64.699,-68.787 R32.2
  Top Layer w0.762: IR16.3 64.5,-63.228 64.699,-63.426 R32.2
pads on no net: IC1.4

## Polygon pours and split planes (outlines as drawn)
GND on Top Layer "GND_L01_P000" (solid, remove dead copper, pour order 0): -14,-105 -14,-76 14,-76 14,-105
GND on Bottom Layer "GND_L02_P001" (solid, remove dead copper, pour order 1): -14,-105 -14,-76 14,-76 14,-105

## Silkscreen, mask and mechanical layers (free items; w line width, h text height)
Mechanical 1:
  circle w0.006: c0,-50 r0.003
  lines w0.013: -64.5,-105.441 -64.5,0 ; -31.5,-103.541 -31.5,1.9 ; 0,-103.1 0,1.9 ; 0,-49.877 0,-50 0.061,-50 ; 31.5,-103.541 31.5,1.9 ; 64.5,-105.441 64.5,0 ; -68.5,-80.5 -68.5,-37.2 ; -68.5,-80.5 -56.5,-68.5 ; -68.5,-80.5 -68.5,-37.2 ; -68.5,-80.5 -56.5,-68.5 ; -68.5,-37.2 -38,-6.7 ; -68.5,-37.2 -38,-6.7 ; -56.5,-68.5 -56.5,-53.5 ; -56.5,-68.5 -56.5,-53.5 ; -56.5,-53.5 -33,-30 ; -56.5,-53.5 -33,-30 ; -38,-6.7 0,0 ; -38,-6.7 0,0 ; -33,-30 -23,-30 ; -33,-30 -23,-30 ; -23,-30 -14,-39 ; -23,-30 -14,-39 ; -14,-105 -14,-39 ; -14,-105 14,-105 ; -14,-105 -14,-39 ; -14,-105 14,-105 ; 0,0 38,-6.7 ; 0,0 38,-6.7 ; 14,-105 14,-39 ; 14,-105 14,-39 ; 14,-39 23,-30 ; 14,-39 23,-30 ; 23,-30 33,-30 ; 23,-30 33,-30 ; 33,-30 56.5,-53.5 ; 33,-30 56.5,-53.5 ; 38,-6.7 68.5,-37.2 ; 38,-6.7 68.5,-37.2 ; 56.5,-68.5 56.5,-53.5 ; 56.5,-68.5 68.5,-80.5 ; 56.5,-68.5 56.5,-53.5 ; 56.5,-68.5 68.5,-80.5 ; 68.5,-80.5 68.5,-37.2 ; 68.5,-80.5 68.5,-37.2